# Altium PCB DUTBoard_NO_CAPS_2.PcbDoc (part 3 of 5)
Units mil, origin at the board's own origin, x right, y up, seen from the top; angles counter-clockwise.
Board outline 5475 x 5475 mil, 4 copper layers (Top Layer, Mid-Layer 1, Mid-Layer 2, Bottom Layer); 57 components, 471 nets, 1641 pads, 1025 vias.
Unrouted connection lines stored in the file: 1.
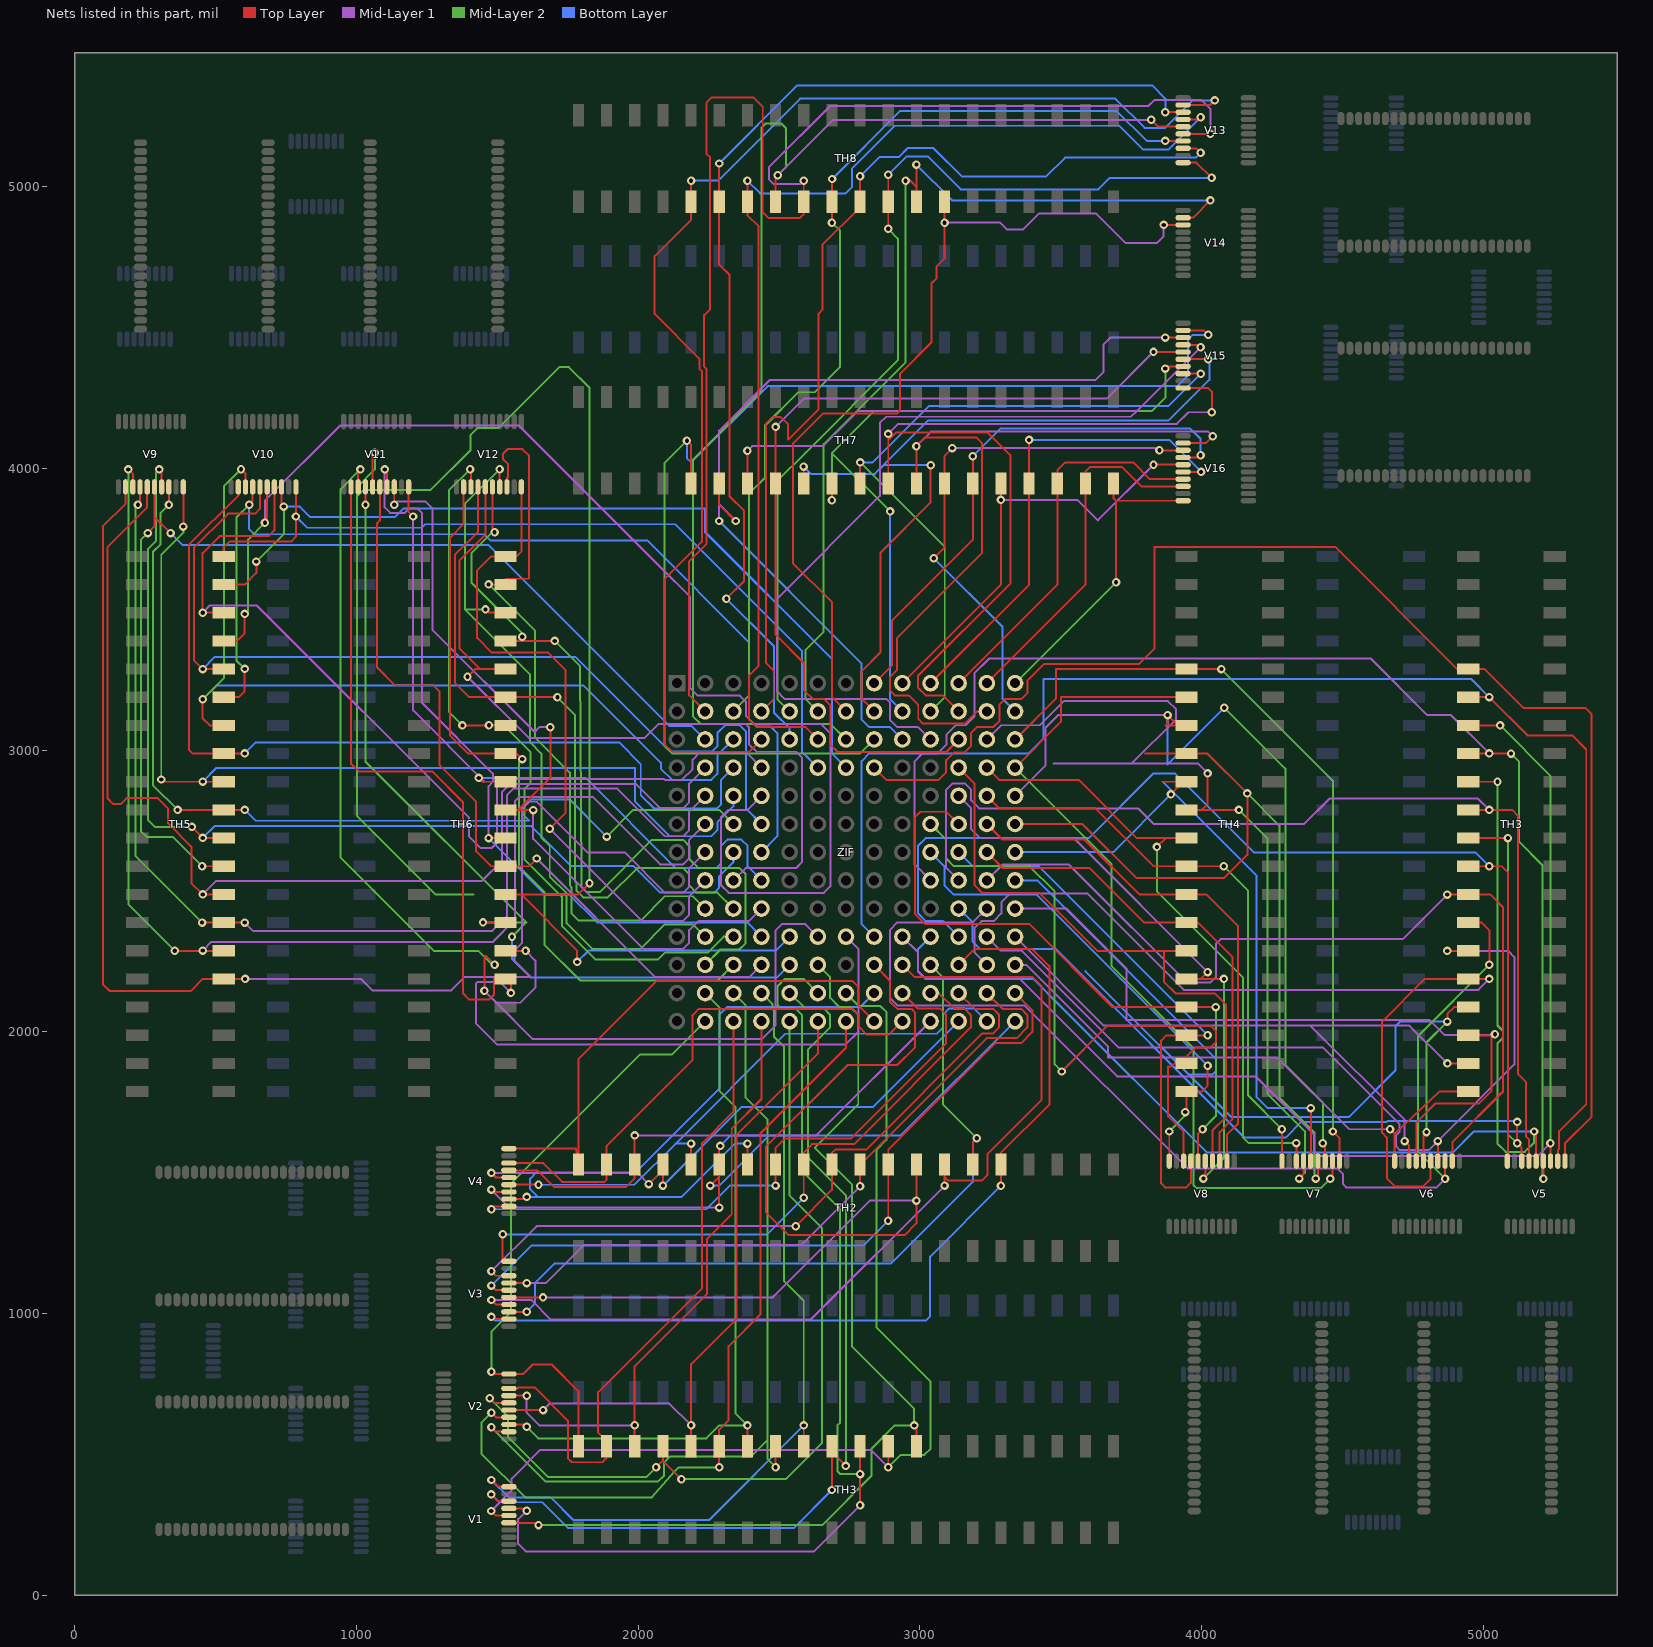
[diagram p5: the nets of this part, all layers, seen from the top]

## Via types
v1: diameter 30, hole 15, Top Layer to Bottom Layer, 1025 vias

## Nets (pads, with @x,y where several pads share a name; then routed paths per layer and width w, separated by ;. In a path a pad name is that pad's centre, name@x,y a point inside that pad or via, vN(x,y) a via of type N, cw(c..) or ccw(c..) an arc to the next point about the centre after c; other vN are vias at no path point) (continued)
INSIDE_B6: TH8.34 V14.IVCC6 ZIF.7 | length 3237.7
  Top Layer w7: ZIF.7@2737.5,3137.5 2688,3187 2688,3524 2549,3663 2549,4088 2655,4194 2917,4194 2930,4207 2930,4336 3041,4447 3041,4656.54 3059,4674.54 3059,4717 3087.5,4745.5 v1(3087.5,4872) TH8.34@3087.5,4946.46 ; v1(3865,4863.98) V14.IVCC6@3933.86,4863.98
  Mid-Layer 1 w7: v1(3087.5,4872) 3285,4872 3310,4847 3365,4847 3422,4904 3625,4904 3730,4799 3840,4799 3865,4824 v1(3865,4863.98)
INSIDE_B7: TH8.33 V14.IVCC7 ZIF.8 | length 3446.8
  Top Layer w7: v1(2949,5021) 2966.5,5021 2987.5,5000 ; TH8.33@2987.5,4946.46 2987.5,5000 ; v1(2987.5,5078) 2987.5,5000 ; V14.IVCC7@3933.86,4889.57 3969.57,4889.57 v1(4031,4951)
  Mid-Layer 2 w7: ZIF.8@2637.5,3137.5 2593,3182 2593,3355 2658,3420 2658,4086 2949,4377 v1(2949,5021)
  Bottom Layer w7: v1(2987.5,5078) 3114.5,4951 v1(4031,4951)
INSIDE_B8: TH8.32 V13.IVCC0 ZIF.9 | length 3477.4
  Top Layer w7: v1(2887.5,4850) TH8.32@2887.5,4946.46 v1(2887.5,5042) ; V13.IVCC0@3933.86,5084.84 3981.16,5084.84 v1(4035,5031)
  Mid-Layer 2 w7: ZIF.9@2537.5,3137.5 2494,3181 2494,3956.04 2593.96,4056 2922,4384.04 2922,4815.5 v1(2887.5,4850)
  Bottom Layer w7: v1(2887.5,5042) 2952.5,5107 3027,5107 3144,4990 3633,4990 3674,5031 v1(4035,5031)
INSIDE_B9: TH8.31 V13.IVCC1 ZIF.10 | length 3640.9
  Top Layer w7: ZIF.10@2437.5,3137.5 2481,3181 2481,3282 2453,3310 2453,4159 2476,4182 2505.7,4182 2532,4155.7 2532,4102 2640,4210 2640,4549.46 2654,4563.46 2654,4793.5 2787.5,4927 TH8.31@2787.5,4946.46 v1(2787.5,5036.5) ; V13.IVCC1@3933.86,5136.02 3979.98,5136.02 v1(3996,5120)
  Bottom Layer w7: v1(2787.5,5036.5) 2855.5,5104.5 2924,5104.5 2956.5,5137 3048,5137 3150,5035 3447,5035 3515,5103 3979,5103 v1(3996,5120)
INSIDE_B10: TH8.30 V13.IVCC2 ZIF.11 | length 3482.8
  Top Layer w7: v1(2687.5,4872) TH8.30@2687.5,4946.46 2687.5,5026.5 v1(2688,5027) ; v1(3871,5162) 3871.39,5161.61 V13.IVCC2@3933.86,5161.61
  Mid-Layer 2 w7: ZIF.11@2337.5,3137.5 2393,3193 2393,3910 2450,3967 2450,4152 2568,4270 2626,4270 2717,4361 2717,4842.5 v1(2687.5,4872)
  Bottom Layer w7: v1(2688,5027) 2929,5268 3699,5268 3805,5162 v1(3871,5162)
INSIDE_B11: TH8.29 V13.IVCC3 ZIF.12 | length 5145.5
  Top Layer w7: ZIF.12@2237.5,3137.5 2181,3194 2181,3669.96 2243,3731.96 2243,4352.15 2234,4361.15 2234,4543.96 2255,4564.96 2255,4900.81 2254.31,4901.49 2254.31,4991.42 2255,4992.1 2255,5104.04 2242,5117.04 2242,5298 2261,5317 2409,5317 2442,5284 2442,4909 2462,4889 2574,4889 2587.5,4902.5 TH8.29@2587.5,4946.46 v1(2587.5,5021) ; V13.IVCC3@3933.86,5187.2 4030.8,5187.2 v1(4031,5187)
  Mid-Layer 1 w7: v1(2587.5,5021) 2575.5,5009 2481,5009 2464,5026 2464,5069 2681,5286 3811,5286 3832,5307 4000,5307 4031,5276 v1(4031,5187)
INSIDE_B12: TH8.28 V13.IVCC4 ZIF.13 | length 4673.2
  Top Layer w7: TH8.28@2487.5,4946.46 2487.5,5032 v1(2495.5,5040) ; v1(3821,5237) 3845.2,5212.8 V13.IVCC4@3933.86,5212.8
  Mid-Layer 1 w7: v1(2495.5,5040) 2692.5,5237 v1(3821,5237)
  Mid-Layer 2 w7: v1(2495.5,5040) 2524,5068.5 2524,5208 2508,5224 2453,5224 2437,5208 2437,4274 2206.15,4043.15 2194,4031 2194,3120 2221,3093 2682,3093 ZIF.13@2737.5,3037.5
INSIDE_B13: TH8.27 V13.IVCC5 ZIF.14 | length 4129.7
  Top Layer w7: v1(2387.5,5021) TH8.27@2387.5,4946.46 2387.5,4899 2427,4859.5 2427,3299 2394,3266 2394,3107 2419,3082 2593,3082 ZIF.14@2637.5,3037.5 ; V13.IVCC5@3933.86,5238.39 3988.39,5238.39 v1(3996,5246)
  Bottom Layer w7: v1(2387.5,5021) 2432.5,4976 2736,4976 2758,4998 2758,5064 2910,5216 3708,5216 3793,5131 3881,5131 v1(3996,5246)
INSIDE_B14: TH8.26 V13.IVCC6 ZIF.15 | length 4028.8
  Top Layer w7: v1(2287.5,5082) TH8.26@2287.5,4946.46 2287.5,4723 2324,4686.5 2324,3901 2376,3849 2376,3600 v1(2313,3537) ; v1(3871,5264) V13.IVCC6@3933.86,5263.98
  Bottom Layer w7: v1(2287.5,5082) 2564.5,5359 3824,5359 3871,5312 v1(3871,5264) ; v1(2313,3537) 2482,3368 2482,3132.15 2537.5,3076.65 ZIF.15@2537.5,3037.5
INSIDE_B15: TH8.25 V13.IVCC7 ZIF.16 | length 4733.3
  Top Layer w7: v1(2187.5,5021) TH8.25@2187.5,4946.46 2187.5,4882.5 2058,4753 2058,4548.5 2217,4389.5 2217,4354.11 2226,4345.11 2226,3739 2093,3606 2093,3021 2120,2994 2394,2994 ZIF.16@2437.5,3037.5 ; V13.IVCC7@3933.86,5289.57 4029.57,5289.57 v1(4046,5306)
  Bottom Layer w7: v1(2187.5,5021) 2284,5021 2575,5312 3694,5312 3797.5,5208.5 3870.5,5208.5 3968,5306 v1(4046,5306)
INSIDE_B16: TH7.40 V16.IVCC0 ZIF.17 | length 1098.8
  Top Layer w7: TH7.40@3687.5,3946.46 3687.5,3893.34 3696,3884.84 ; v1(3696,3596) 3696,3884.84 ; V16.IVCC0@3933.86,3884.84 3696,3884.84
  Mid-Layer 2 w7: ZIF.17@3337.5,3237.5 v1(3696,3596)
INSIDE_B17: TH7.39 V16.IVCC1 ZIF.18 | length 1276.6
  Top Layer w7: ZIF.18@3237.5,3237.5 3587.5,3587.5 TH7.39@3587.5,3946.46 3587.5,3988 3603.5,4004 3717.91,4004 3785.89,3936.02 V16.IVCC1@3933.86,3936.02
INSIDE_B18: TH7.38 V16.IVCC2 ZIF.19 | length 1383
  Top Layer w7: ZIF.19@3137.5,3237.5 3487.5,3587.5 TH7.38@3487.5,3946.46 3487.5,3993 3515.5,4021 3757,4021 3816.39,3961.61 V16.IVCC2@3933.86,3961.61
INSIDE_B19: TH7.37 V16.IVCC3 ZIF.20 | length 1730.3
  Top Layer w7: ZIF.20@3037.5,3237.5 3387.5,3587.5 TH7.37@3387.5,3946.46 v1(3387.5,4101) ; V16.IVCC3@3933.86,3987.2 v1(3998,3987.2)
  Bottom Layer w7: v1(3387.5,4101) 3884.2,4101 v1(3998,3987.2)
INSIDE_B20: TH7.36 V16.IVCC4 ZIF.21 | length 1612.5
  Top Layer w7: ZIF.21@2937.5,3237.5 3287.5,3587.5 v1(3287.5,3888) TH7.36@3287.5,3946.46 ; v1(3829,4012.8) V16.IVCC4@3933.86,4012.8
  Mid-Layer 1 w7: v1(3287.5,3888) 3558.2,3888 3631.2,3815 v1(3829,4012.8)
INSIDE_B21: TH7.35 V16.IVCC5 ZIF.22 | length 1938.6
  Top Layer w7: ZIF.22@2837.5,3237.5 2900,3300 2900,3459.7 3187.5,3747.2 TH7.35@3187.5,3946.46 v1(3187.5,4043) ; V16.IVCC5@3933.86,4038.39 3987.61,4038.39 v1(3996,4046.77)
  Bottom Layer w7: v1(3187.5,4043) 3286.5,4142 3958,4142 3996,4104 v1(3996,4046.77)
INSIDE_B22: TH7.34 V16.IVCC6 ZIF.23 | length 1903.5
  Top Layer w7: v1(3049,3681) 3087.5,3719.5 TH7.34@3087.5,3946.46 3087.5,4044.5 v1(3115,4072) ; v1(3850,4063.98) V16.IVCC6@3933.86,4063.98
  Mid-Layer 1 w7: v1(3115,4072) 3841.98,4072 v1(3850,4063.98)
  Bottom Layer w7: v1(3049,3681) 3293,3437 3293,3182 ZIF.23@3337.5,3137.5
INSIDE_B23: TH7.33 V16.IVCC7 ZIF.24 | length 3035.3
  Top Layer w7: TH7.33@2987.5,3946.46 v1(2987.5,4078) 2987.5,4080 3016.5,4109 3201,4109 3221,4089 3221,3700 2919,3398 2919,3285 2894,3260 2894,3210.47 2910.47,3194 2960.47,3194 2994,3160.47 2994,3110.47 3010.47,3094 3159.53,3094 3203.03,3137.5 ZIF.24@3237.5,3137.5 ; V16.IVCC7@3933.86,4089.57 4014.57,4089.57 v1(4039,4114)
  Mid-Layer 1 w7: v1(2987.5,4078) 3039.5,4130 4023,4130 v1(4039,4114)
INSIDE_B24: TH7.32 V15.IVCC0 ZIF.25 | length 3308.8
  Top Layer w7: v1(2887.5,4122.3) TH7.32@2887.5,3946.46 2887.5,4100 2914.5,4127 3241,4127 3321,4047 3321,3591 2993,3263 2993,3221 3020,3194 3081,3194 ZIF.25@3137.5,3137.5 ; V15.IVCC0@3933.86,4284.84 4023,4284.84 4036,4271.84 v1(4036,4199)
  Mid-Layer 1 w7: v1(2887.5,4122.3) 2923.2,4158 3912.16,4158 3953.16,4199 v1(4036,4199)
INSIDE_B25: TH7.31 V15.IVCC1 ZIF.26 | length 2506.1
  Top Layer w7: TH7.31@2787.5,3946.46 2787.5,4020.5 v1(2788,4021) ; V15.IVCC1@3933.86,4336.02 v1(3997,4336)
  Mid-Layer 2 w7: v1(2788,4021) 3088,3721 3088,3188 ZIF.26@3037.5,3137.5
  Bottom Layer w7: v1(2788,4021) 2832,4021 3032,4221 3882,4221 v1(3997,4336)
INSIDE_B26: TH7.30 V15.IVCC2 ZIF.27 | length 2679.8
  Top Layer w7: v1(2687.5,3887) TH7.30@2687.5,3946.46 ; v1(3871,4354) 3878.61,4361.61 V15.IVCC2@3933.86,4361.61
  Mid-Layer 2 w7: v1(2687.5,3887) 2687.5,4053.5 ; v1(2894,3847) 2687.5,4053.5 ; v1(3871,4354) 3871,4251 3824,4204 2838,4204 2687.5,4053.5
  Bottom Layer w7: v1(2894,3847) 2894,3181 ZIF.27@2937.5,3137.5
INSIDE_B27: TH7.29 V15.IVCC3 ZIF.28 | length 3017.1
  Top Layer w7: v1(2587,4006) 2587.5,4005.5 TH7.29@2587.5,3946.46 ; ZIF.28@2837.5,3137.5 2793,3182 2793,3280 2860,3347 2860,3701 3038,3879 v1(3038,4011) ; V15.IVCC3@3933.86,4387.2 v1(4023,4387.2)
  Bottom Layer w7: v1(2587,4006) 2613,3980 2840,3980 ; v1(3038,4011) 2871,4011 2840,3980 ; v1(4023,4387.2) 4027,4383.2 4027,4314 3883,4170 3030,4170 2840,3980
INSIDE_B28: TH7.28 V15.IVCC4 ZIF.29 | length 3273.3
  Top Layer w7: v1(2487.5,4147) TH7.28@2487.5,3946.46 2487.5,3409.5 2588,3309 2588,3213 2619,3182 2659,3182 2682,3159 2682,3019 2708,2993 3093,2993 ZIF.29@3137.5,3037.5 ; v1(3829,4413) 3829.2,4412.8 V15.IVCC4@3933.86,4412.8
  Mid-Layer 1 w7: v1(2487.5,4147) 2587.5,4247 3663,4247 v1(3829,4413)
INSIDE_B29: TH7.27 V15.IVCC5 ZIF.30 | length 4625.5
  Top Layer w7: TH7.27@2387.5,3946.46 v1(2387.5,4062) ; V15.IVCC5@3933.86,4438.39 3987.61,4438.39 v1(3996,4430)
  Mid-Layer 1 w7: v1(2387.5,4062) 2404,4078.5 2655.5,4078.5 2780,4203 3769,4203 ; ZIF.30@3037.5,3037.5 2994,3081 2920,3081 2893,3108 2893,3169 2880,3182 2519,3182 2493,3208 2493,3537 2858,3902 2858,4161 2880,4183 3749,4183 3769,4203 ; v1(3996,4430) 3769,4203
INSIDE_B30: TH7.26 V15.IVCC6 ZIF.31 | length 3490.8
  Top Layer w7: TH7.26@2287.5,3946.46 2287.5,3871.5 v1(2346,3813) ; v1(3871,4464) V15.IVCC6@3933.86,4463.98
  Mid-Layer 1 w7: v1(2287,3813) 2287,3872 ; v1(2346,3813) 2287,3872 ; v1(3871,4464) 3676,4464 3652,4440 3652,4343 3622,4313 2466,4313 2287,4134 2287,3872
  Bottom Layer w7: v1(2287,3813) 2792,3308 2792,3109 2820,3081 2894,3081 ZIF.31@2937.5,3037.5
INSIDE_B31: TH7.25 V15.IVCC7 ZIF.32 | length 4325.5
  Top Layer w7: v1(2173,4098) 2187.5,4083.5 TH7.25@2187.5,3946.46 ; V15.IVCC7@3933.86,4489.57 4007.43,4489.57 v1(4023,4474)
  Mid-Layer 2 w7: v1(2173,4098) 2094,4019 2094,3014 2120,2988 2788,2988 ZIF.32@2837.5,3037.5
  Bottom Layer w7: v1(2173,4098) 2173,4036 2188,4021 2459,4292 3914,4292 3952,4330 3952,4458 3968,4474 v1(4023,4474)
INSIDE_B32: TH6.40 V12.IVCC0 ZIF.33 | length 2386.5
  Top Layer w7: V12.IVCC0@1585.16,3933.86 1585.16,3704 1568.66,3687.5 TH6.40@1528.54,3687.5 1477.5,3687.5 1428,3638 1428,3398 1480,3346 1680,3346 1742,3284 1742,2777 v1(1686,2721)
  Mid-Layer 1 w7: v1(1686,2721) 2013,2394 2159.53,2394 2181,2415.47 2181,2481 ZIF.33@2237.5,2537.5
INSIDE_B33: TH6.39 V12.IVCC1 ZIF.34 | length 2664.8
  Top Layer w7: v1(1469,3588) 1469.5,3587.5 TH6.39@1528.54,3587.5 1528.54,3608 1613,3608 1613,4044 1589,4068 1536,4068 1520,4052 1520,4032.92 1537,4015.92 1537,3968.03 1533.98,3965 V12.IVCC1@1533.98,3933.86
  Mid-Layer 2 w7: v1(1469,3588) 1634,3423 1634,3043.01 1757,2920.01 1757,2519.35 1763,2513.35 1763,2421 1789.53,2394.47 2008.42,2394.47 2094.94,2481 2194,2481 ZIF.34@2237.5,2437.5
INSIDE_B34: TH6.38 V12.IVCC2 ZIF.35 | length 2607.9
  Top Layer w7: v1(1457.98,3499.02) 1469.5,3487.5 TH6.38@1528.54,3487.5 ; v1(1508,3997) 1508.39,3996.61 V12.IVCC2@1508.39,3933.86
  Mid-Layer 2 w7: v1(1457.98,3499.02) 1384.48,3499.02 ; v1(1508,3997) 1384.48,3873.48 1384.48,3499.02 ; ZIF.35@2237.5,2337.5 2194,2381 2094.94,2381 2008.42,2294.47 1836.53,2294.47 1746,2385 1746,2491 1686,2551 1686,2660 1656.42,2689.58 1656.42,2987.43 1616,3027.85 1616,3267.5 1384.48,3499.02
INSIDE_B35: TH6.37 V12.IVCC3 ZIF.36 | length 2917.2
  Top Layer w7: V12.IVCC3@1482.8,3933.86 1482.8,3780.2 v1(1490,3773) ; TH6.37@1528.54,3387.5 1573.5,3387.5 ; v1(1588,3402) 1573.5,3387.5 ; v1(1703.5,3387.5) 1573.5,3387.5
  Mid-Layer 2 w7: v1(1490,3773) 1482,3773 1409,3700 1409,3593 1588,3414 v1(1588,3402) ; v1(1703.5,3387.5) 1792.5,3298.5 1798,2546.35 1798,2514.5 1816.5,2496 1863,2496 2048,2681 2159.53,2681 2182,2658.53 2182,2613.06 2214.06,2581 2360,2581 2381,2560 2381,2315 2358,2292 2292,2292 ZIF.36@2237.5,2237.5
INSIDE_B36: TH6.36 V12.IVCC4 ZIF.37 | length 2884.8
  Top Layer w7: v1(1394,3260.5) 1421,3287.5 1438.5,3287.5 ; V12.IVCC4@1457.2,3933.86 1457.2,3764.2 1366,3673 1366,3360 1438.5,3287.5 ; TH6.36@1528.54,3287.5 1438.5,3287.5
  Mid-Layer 1 w7: v1(1394,3260.5) 1611.5,3043 2023,3043 2073,3093 2381,3093 2393,3081 2393,3021.15 2420.15,2994 2560.47,2994 2582,2972.47 2582,2603 2560,2581 2381,2581 ZIF.37@2337.5,2537.5
INSIDE_B37: TH6.35 V12.IVCC5 ZIF.38 | length 2522.5
  Top Layer w7: V12.IVCC5@1431.61,3933.86 1431.61,3775.61 1349,3693 1349,3238.5 1400,3187.5 TH6.35@1528.54,3187.5 v1(1713,3187.5)
  Mid-Layer 2 w7: v1(1713,3187.5) 1775.5,3125 1775.5,2534.85 1781,2529.35 1781,2500 1804.13,2476.87 1891.87,2476.87 1996,2581 2159.53,2581 2181,2559.53 2181,2519.53 2206.53,2494 2281,2494 ZIF.38@2337.5,2437.5
INSIDE_B38: TH6.34 V12.IVCC6 ZIF.39 | length 2736.6
  Top Layer w7: v1(1376,3087.5) v1@1470.5,3087.5 ; v1(1403,3997) 1406.02,3993.98 V12.IVCC6@1406.02,3933.86 ; v1(1470,3088) v1@1470.5,3087.5 ; TH6.34@1528.54,3087.5 v1@1470.5,3087.5
  Mid-Layer 2 w7: v1(1376,3087.5) 1328,3135.5 1328,3922 v1(1403,3997) ; v1(1470,3088) 1522,3088 1618,2992 1618,2884 1597,2863 1597,2611.35 1729,2479.35 1729,2377 1850,2256 2069.47,2256 2094.47,2281 2247,2281 2303.5,2337.5 ZIF.39@2337.5,2337.5
INSIDE_B39: TH6.33 V12.IVCC7 ZIF.40 | length 2639.9
  Top Layer w7: V12.IVCC7@1380.43,3933.86 1380.43,3802.43 1332,3754 1332,3051.5 1396,2987.5 TH6.33@1528.54,2987.5 1568.5,2987.5 v1(1588,2968)
  Mid-Layer 2 w7: v1(1588,2968) 1577,2957 1577,2586.07 1666.61,2496.46 1666.61,2309.39 1794,2182 2282,2182 ZIF.40@2337.5,2237.5
INSIDE_B40: TH6.32 V11.IVCC0 ZIF.41 | length 2599.3
  Top Layer w7: V11.IVCC0@1185.16,3933.86 1185.16,3844.84 v1(1201,3829) ; v1(1434,2901) 1447.5,2887.5 TH6.32@1528.54,2887.5
  Mid-Layer 1 w7: v1(1201,3829) 1201,3141 1454,2888 1447,2888 v1(1434,2901)
  Bottom Layer w7: v1(1434,2901) 1813,2901 2132,2582 2279,2582 2293,2596 2293,2659 2316,2682 2366,2682 2388,2660 2388,2587 ZIF.41@2437.5,2537.5
INSIDE_B41: TH6.31 V11.IVCC1 ZIF.42 | length 2819.9
  Top Layer w7: v1(1133.98,3871) V11.IVCC1@1133.98,3933.86 ; TH6.31@1528.54,2787.5 1574.5,2787.5 ; v1(1627,2787) 1626.5,2787.5 1574.5,2787.5 ; v1(1688,3081) 1688,2901 1574.5,2787.5
  Mid-Layer 1 w7: v1(1133.98,3871) 1145.48,3882.5 1244.5,3882.5 1270,3857 1270,3426 1632,3064 1649,3081 v1(1688,3081) ; v1(1627,2787) 1627,2685 2018,2294 2159.53,2294 2181,2315.47 2181,2360.94 2214.06,2394 2394,2394 ZIF.42@2437.5,2437.5
INSIDE_B42: TH6.30 V11.IVCC2 ZIF.43 | length 2791.6
  Top Layer w7: v1(1100,3996) 1108.39,3987.61 V11.IVCC2@1108.39,3933.86 ; v1(1469,2687.5) TH6.30@1528.54,2687.5
  Mid-Layer 1 w7: v1(1100,3996) 1100,3861 1119,3842 1172,3842 1188,3858 1215.5,3858 1233,3840.5 1233,3167 1484,2916 1484,2886.75 1469,2871.75 v1(1469,2687.5)
  Bottom Layer w7: v1(1469,2687.5) 1668.5,2488 1754,2488 1854,2388 2387,2388 ZIF.43@2437.5,2337.5
INSIDE_B43: TH6.29 V11.IVCC3 ZIF.44 | length 2761.4
  Top Layer w7: V11.IVCC3@1082.8,3933.86 1082.8,3815 1073,3805.2 1073,3293 1136,3230 1272,3230 1294,3208 1294,2948 1425,2817 1425,2640 1477.5,2587.5 TH6.29@1528.54,2587.5 1612.5,2587.5 v1(1640,2615)
  Mid-Layer 1 w7: v1(1640,2615) 2061,2194 2394,2194 ZIF.44@2437.5,2237.5
INSIDE_B44: TH6.28 V11.IVCC4 ZIF.45 | length 7368.9
  Top Layer w7: V11.IVCC4@1057.2,3933.86 1057.2,4047.2 v1(1065,4055) ; TH6.28@1528.54,2487.5 1584,2487.5 ; v1(1783.5,2248) 1783.5,2288 1584,2487.5 ; v1(1827,2527.5) 1787,2487.5 1584,2487.5
  Mid-Layer 2 w7: v1(1065,4055) 1065,3996 1002,3933 1002,2765 ; 1416,2487.5 1279.5,2487.5 1002,2765 ; v1(1827,2527.5) 1827,4286 1754,4359 1719.96,4359 1503.96,4143 1429,4143 1405,4119 1405,4065.04 1263.46,3923.5 1025.5,3923.5 1001,3899 1001,2766 1002,2765
  Bottom Layer w7: v1(1783.5,2248) 1823.5,2288 2488,2288 ZIF.45@2537.5,2337.5
INSIDE_B45: TH6.27 V11.IVCC5 ZIF.46 | length 3197.7
  Top Layer w7: V11.IVCC5@1031.61,3933.86 1031.61,3871.39 v1(1032,3871) ; v1(1449,2388) 1449.5,2387.5 TH6.27@1528.54,2387.5
  Mid-Layer 2 w7: v1(1032,3871) 1032,2959 1603,2388 ; v1(1449,2388) 1603,2388 ; v1(1552,2337) 1603,2388
  Bottom Layer w7: v1(1552,2337) 1552,2259 1618,2193 2493,2193 ZIF.46@2537.5,2237.5
INSIDE_B46: TH6.26 V11.IVCC6 ZIF.47 | length 4364.8
  Top Layer w7: V11.IVCC6@1006.02,3933.86 1006.02,3988.02 v1(1014,3996) ; v1(1454,2146) 1454,2269.5 1458.5,2269.5 v1(1490,2238) ; TH6.26@1528.54,2287.5 v1(1600,2287.5)
  Mid-Layer 1 w7: v1(1454,2146) 1497,2103 ; v1(1600,2287.5) 1635,2252.5 1635,2157 1581,2103 1497,2103 ; ZIF.47@2637.5,2337.5 2593,2382 2510,2382 2488,2360 2488,2023 2439,1974 1626,1974 1497,2103
  Mid-Layer 2 w7: v1(1014,3996) 944,3926 944,2618 1274.5,2287.5 1432,2287.5 1481.5,2238 v1(1490,2238)
INSIDE_B47: TH6.25 V11.IVCC7 ZIF.48 | length 4453.4
  Top Layer w7: V11.IVCC7@980.43,3933.86 980.43,2951.57 1008,2924 1269,2924 1378,2815 1378,2136 1399,2115 1472,2115 1488,2131 1488,2187.5 TH6.25@1528.54,2187.5 1548,2187.5 v1(1548,2138)
  Mid-Layer 1 w7: v1(1548,2138) 1510,2176 1429,2176 1424,2171 1424,2030 1500,1954 2735,1954 2782,2001 2782,2293 ZIF.48@2737.5,2337.5
INSIDE_B48: TH5.40 V10.IVCC0 ZIF.49 | length 2923.3
  Top Layer w7: TH5.40@528.54,3687.5 528.54,3720 548.54,3740 768,3740 785.16,3757.16 v1@785.16,3829.16 ; v1(785,3829) v1@785.16,3829.16 ; V10.IVCC0@785.16,3933.86 v1@785.16,3829.16
  Bottom Layer w7: v1(785,3829) 825,3789 1231,3789 1243.5,3801.5 2131.5,3801.5 2582,3351 2582,2993 ZIF.49@2637.5,2937.5
INSIDE_B49: TH5.39 V10.IVCC1 ZIF.50 | length 3132.7
  Top Layer w7: TH5.39@528.54,3587.5 603,3587.5 644.5,3629 v1(644.5,3669) ; V10.IVCC1@733.98,3933.86 733.98,3872 v1(741.98,3864)
  Mid-Layer 2 w7: v1(644.5,3669) 741.98,3766.48 v1(741.98,3864)
  Bottom Layer w7: v1(741.98,3864) 799,3864 836,3827 1136,3827 1167,3858 2237,3858 2237,3774 2688,3323 2688,2987 ZIF.50@2737.5,2937.5
INSIDE_B50: TH5.38 V10.IVCC2 ZIF.51 | length 3420.6
  Top Layer w7: TH5.38@528.54,3487.5 485,3487.5 v1(454,3487.5) 454,3699 514.39,3759.39 688,3759.39 708.39,3779.77 V10.IVCC2@708.39,3933.86
  Mid-Layer 1 w7: v1(454,3487.5) 479.5,3513 646,3513 1400,2759 1400,2693 1440,2653 1481,2653 1499,2671 1499,2873 1523,2897 2091.47,2897 2094.47,2894 2155,2894 2193,2932 2193,2966 2219,2992 2383,2992 ZIF.51@2437.5,2937.5
INSIDE_B51: TH5.37 V10.IVCC3 ZIF.52 | length 4875
  Top Layer w7: TH5.37@528.54,3387.5 576,3387.5 603,3414.5 v1(603,3483) ; v1(675,3807) 682.8,3814.8 V10.IVCC3@682.8,3933.86
  Mid-Layer 1 w7: v1(675,3807) 675,3884.31 942.7,4152 1576,4152 2080,3648 2184,3544 2184,3220 2211,3193 2361,3193 2382,3172 2382,3121 2410,3093 2648,3093 2682,3059 2682,2516 2659,2493 2321,2493 2293,2521 2293,2761 2320,2788 2388,2788 ZIF.52@2437.5,2837.5
  Mid-Layer 2 w7: v1(603,3483) 615,3495 615,3747 v1(675,3807)
INSIDE_B52: TH5.36 V10.IVCC4 ZIF.53 | length 3399
  Top Layer w7: TH5.36@528.54,3287.5 v1(454,3287.5) 423,3318.5 423,3718 544,3839 640,3839 657.2,3856.2 V10.IVCC4@657.2,3933.86
  Bottom Layer w7: v1(454,3287.5) 497.5,3331 1777,3331 2113.53,2994.47 2261.47,2994.47 2281,3014 2281,3060.47 2308.53,3088 2360,3088 2382,3066 2382,2793 ZIF.53@2437.5,2737.5
INSIDE_B53: TH5.35 V10.IVCC5 ZIF.54 | length 3712
  Top Layer w7: TH5.35@528.54,3187.5 582.5,3187.5 603,3208 v1(603,3288) ; v1(619,3871) 631.61,3883.61 V10.IVCC5@631.61,3933.86
  Mid-Layer 2 w7: v1(603,3288) 574,3317 574,3826 v1(619,3871)
  Bottom Layer w7: v1(619,3871) 619,3784 637,3766 1454.04,3766 1475.54,3744.5 2031.5,3744.5 2393,3383 2393,3110.61 2420,3083.61 2470.39,3083.61 2494,3060 2494,2694 ZIF.54@2437.5,2637.5
INSIDE_B54: TH5.34 V10.IVCC6 ZIF.55 | length 3248.5
  Top Layer w7: v1(454,3180) 454,3112 478.5,3087.5 TH5.34@528.54,3087.5 ; v1(590,3997) 606.02,3980.98 V10.IVCC6@606.02,3933.86
  Mid-Layer 2 w7: v1(454,3180) 529,3255 529,3936 v1(590,3997)
  Bottom Layer w7: v1(454,3180) 503,3229 1806,3229 2080,2955 2080,2934 2120,2894 2259.53,2894 2281,2915.47 2281,2981 ZIF.55@2337.5,3037.5
INSIDE_B55: TH5.33 V10.IVCC7 ZIF.56 | length 3232.5
  Top Layer w7: V10.IVCC7@580.43,3933.86 580.43,3903.43 405,3728 405,3000.5 418,2987.5 TH5.33@528.54,2987.5 602.5,2987.5 v1(603,2988)
  Bottom Layer w7: v1(603,2988) 642,3027 1733,3027 1932,3027 2009,2950 2009,2840 2056,2793 2280,2793 2293,2806 2293,2893 ZIF.56@2337.5,2937.5
INSIDE_B56: TH5.32 V9.IVCC0 ZIF.57 | length 3468.9
  Top Layer w7: v1(307,2895.5) 315,2887.5 v1@454.5,2887.5 ; v1(385.16,3793) V9.IVCC0@385.16,3933.86 ; v1(454,2888) v1@454.5,2887.5 ; TH5.32@528.54,2887.5 v1@454.5,2887.5
  Mid-Layer 2 w7: v1(307,2895.5) 307,3693.2 385.16,3771.36 v1(385.16,3793)
  Bottom Layer w7: v1(454,2888) 503,2937 1989,2937 1989,2817 2112,2694 2259.53,2694 2281,2715.47 2281,2743.5 2337.5,2800 ZIF.57@2337.5,2837.5
INSIDE_B57: TH5.31 V9.IVCC1 ZIF.58 | length 3400.6
  Top Layer w7: v1(334,3871) V9.IVCC1@333.98,3933.86 ; v1(365,2787.5) TH5.31@528.54,2787.5 v1(603.5,2787.5)
  Mid-Layer 2 w7: v1(334,3871) 305,3842 305,3731 277,3703 277,2875.5 v1(365,2787.5) ; v1(1888,2693) 1983,2788 2287,2788 ZIF.58@2337.5,2737.5
  Bottom Layer w7: v1(603.5,2787.5) 642,2749 1613.8,2749 1590,2772.8 1590,2792.8 1622.2,2825 1756,2825 v1(1888,2693)
INSIDE_B58: TH5.30 V9.IVCC2 ZIF.59 | length 3725.4
  Top Layer w7: v1(300,3996) 308.39,3987.61 V9.IVCC2@308.39,3933.86 ; v1(416,2727) v1(454,2688) ; TH5.30@528.54,2687.5 v1@454.5,2687.5 ; v1(454,2688) v1@454.5,2687.5 ; v1(454,2688) v1@454.5,2687.5
  Mid-Layer 2 w7: v1(300,3996) 287.5,3983.5 287.5,3741.7 260,3714.2 260,2751 284,2727 v1(416,2727)
  Bottom Layer w7: v1(454,2688) 496,2730 1620.5,2730 1762.5,2588 1983.94,2588 2077.94,2494 2269.53,2494 2287.32,2511.79 2287.32,2551.47 2337.5,2601.65 ZIF.59@2337.5,2637.5
INSIDE_B59: TH5.29 V9.IVCC3 ZIF.60 | length 3868.6
  Top Layer w7: v1(259,3770.2) 282.8,3794 282.8,3827.2 ; V9.IVCC3@282.8,3933.86 282.8,3827.2 ; v1(340,3770) 282.8,3827.2 ; v1(452,2587.5) TH5.29@528.54,2587.5
  Mid-Layer 2 w7: v1(259,3770.2) 235,3746.2 235,2712 255,2692 347.5,2692 v1(452,2587.5)
  Bottom Layer w7: v1(340,3770) 382,3728 1468,3728 2108,3088 2111,3085 2190,3085 ZIF.60@2237.5,3037.5
INSIDE_B60: TH5.28 V9.IVCC4 ZIF.61 | length 4063.1
  Top Layer w7: V9.IVCC4@257.2,3933.86 257.2,3861.2 117,3721 117,2828 137,2808 163,2808 184,2829 294,2829 331,2792 331,2740 414,2657 414,2527.5 v1(454,2487.5) TH5.28@528.54,2487.5
  Mid-Layer 1 w7: v1(454,2487.5) 502,2535.5 1445.5,2535.5 1516,2606 1516,2850.75 1545.25,2880 1991.94,2880 2077.94,2794 2159.53,2794 2181,2815.47 2181,2881 ZIF.61@2237.5,2937.5
INSIDE_B61: TH5.27 V9.IVCC5 ZIF.62 | length 4078
  Top Layer w7: v1(224,3871) 231.61,3878.61 V9.IVCC5@231.61,3933.86 ; v1(452,2387.5) TH5.27@528.54,2387.5 v1(603,2387.5)
  Mid-Layer 1 w7: v1(603,2387.5) 632.5,2358 1482,2358 1534,2410 1534,2840 1557,2863 1925.94,2863 2094.94,2694 2159.53,2694 2181,2715.47 2181,2781 ZIF.62@2237.5,2837.5
  Mid-Layer 2 w7: v1(224,3871) 215,3862 215,2624.5 v1(452,2387.5)
INSIDE_B62: TH5.26 V9.IVCC6 ZIF.63 | length 4473.6
  Top Layer w7: v1(190,3996) 206.02,3979.98 V9.IVCC6@206.02,3933.86 ; v1(355,2287.5) v1@454,2287.5 ; v1(454,2288) v1@454,2287.5 ; TH5.26@528.54,2287.5 v1@454,2287.5
  Mid-Layer 1 w7: v1(454,2288) 485,2319 1484.5,2319 1562.41,2396.91 1562.41,2818.69 1577.72,2834 1837.94,2834 2077.94,2594 2159.53,2594 2181,2615.47 2181,2681 ZIF.63@2237.5,2737.5
  Mid-Layer 2 w7: v1(190,3996) 190,2452.5 v1(355,2287.5)
INSIDE_B63: TH5.25 V9.IVCC7 ZIF.64 | length 4904.6
  Top Layer w7: V9.IVCC7@180.43,3933.86 180.43,3874.43 100,3794 100,2169 125,2144 411.5,2144 455,2187.5 TH5.25@528.54,2187.5 v1(604.52,2187.5)
  Mid-Layer 1 w7: v1(604.52,2187.5) 1015.5,2187.5 1056,2147 1337,2147 1385,2195 1617,2195 1560,2252 1560,2288 1588,2316 1588,2794 1610.5,2816.5 1640,2816.5 1819.5,2637 1951.94,2637 2094.94,2494 2159.53,2494 2181,2515.47 2181,2581 ZIF.64@2237.5,2637.5
INSIDE_B64: TH4.40 V8.IVCC0 ZIF.65 | length 1763.1
  Top Layer w7: V8.IVCC0@3884.84,1541.14 3884.84,1645.84 v1(3885,1646) ; v1(3942,1715) 3946.46,1719.46 TH4.40@3946.46,1787.5 4000,1787.5 4021,1808.5 v1(4021,1879)
  Mid-Layer 2 w7: v1(3885,1646) 3942,1703 v1(3942,1715)
  Bottom Layer w7: ZIF.65@3037.5,2637.5 3087,2588 3087,2520 3119,2488 3412,2488 3712,2188 v1(4021,1879)
INSIDE_B65: TH4.39 V8.IVCC1 ZIF.66 | length 2468
  Top Layer w7: v1(3503,1859) 3665,2021 3687,2021 4032,2021 4051,2002 4051,1964 4032,1945 3979,1945 3946.46,1912.46 TH4.39@3946.46,1887.5 3904,1887.5 3892.5,1876 3881,1876 3881,1864.5 3881,1700.02 3936.02,1645 V8.IVCC1@3936.02,1541.14
  Mid-Layer 2 w7: ZIF.66@3037.5,2737.5 3093,2682 3093,2615 3120,2588 3388,2588 3478,2498 3478,1884 v1(3503,1859)
INSIDE_B66: TH4.38 V8.IVCC2 ZIF.67 | length 2027.4
  Top Layer w7: V8.IVCC2@3961.61,1541.14 3961.61,1464 3945.44,1447.82 3870.18,1447.82 3856,1462 3856,1939.5 3856,1968.5 3875,1987.5 3904,1987.5 TH4.38@3946.46,1987.5 4020.5,1987.5 v1(4021,1988)
  Bottom Layer w7: ZIF.67@3137.5,2637.5 3187,2588 3421,2588 3754,2255 v1(4021,1988)
INSIDE_B67: TH4.37 V8.IVCC3 ZIF.68 | length 2301.5
  Top Layer w7: ZIF.68@3137.5,2737.5 3094,2781 3002,2781 2982,2761 2982,2419 3019,2382 3389,2382 3683.5,2087.5 3818,2087.5 TH4.37@3946.46,2087.5 v1(4050,2087.5) ; V8.IVCC3@3987.2,1541.14 3987.2,1638.2 v1(4003,1654)
  Mid-Layer 2 w7: v1(4003,1654) 4050,1701 v1(4050,2087.5)
INSIDE_B68: TH4.36 V8.IVCC4 ZIF.69 | length 2156.8
  Top Layer w7: TH4.36@3946.46,2187.5 3996.5,2187.5 ; v1(4006,1479) 4012.8,1485.8 V8.IVCC4@4012.8,1541.14 ; v1(4021,2212) 3996.5,2187.5 ; v1(4079,2187.5) 3996.5,2187.5
  Mid-Layer 1 w7: ZIF.69@3137.5,2837.5 3182,2793 3182,2719 3213,2688 3545,2688 v1(4021,2212)
  Mid-Layer 2 w7: v1(4006,1479) 4079,1552 v1(4079,2187.5)
INSIDE_B69: TH4.35 V8.IVCC5 ZIF.70 | length 2229.7
  Top Layer w7: ZIF.70@3137.5,2937.5 3194,2881 3194,2520 3222,2492 3425,2492 3629.5,2287.5 3866,2287.5 ; TH4.35@3946.46,2287.5 3866,2287.5 ; V8.IVCC5@4038.39,1541.14 4038.39,1650.28 4087,1698.9 4087,2096 4047,2136 3907,2136 3866,2177 3866,2287.5
INSIDE_B70: TH4.34 V8.IVCC6 ZIF.71 | length 1768.9
  Top Layer w7: ZIF.71@3237.5,2637.5 3293,2582 3601.5,2582 3796,2387.5 TH4.34@3946.46,2387.5 3987.5,2387.5 4109,2266 4109,1689 4063.98,1643.98 V8.IVCC6@4063.98,1541.14
INSIDE_B71: TH4.33 V8.IVCC7 ZIF.72 | length 1891.6
  Top Layer w7: ZIF.72@3237.5,2737.5 3293,2682 3584,2682 3778.5,2487.5 3806,2487.5 TH4.33@3946.46,2487.5 4016,2487.5 4129,2374.5 4129,1674.43 4089.57,1635 V8.IVCC7@4089.57,1541.14
INSIDE_B72: TH4.32 V7.IVCC0 ZIF.73 | length 2076.1
  Top Layer w7: ZIF.73@3237.5,2837.5 3281,2794 3623,2794 3829.5,2587.5 TH4.32@3946.46,2587.5 v1(4078,2587.5) ; V7.IVCC0@4284.84,1541.14 v1(4284.84,1654)
  Mid-Layer 2 w7: v1(4078,2587.5) 4165,2500.5 4165,1773.84 v1(4284.84,1654)
INSIDE_B73: TH4.31 V7.IVCC1 ZIF.74 | length 2276.3
  Top Layer w7: ZIF.74@3237.5,2937.5 3281,2894 3563.5,2894 3770,2687.5 3872.5,2687.5 ; v1(3841,2656) 3872.5,2687.5 ; TH4.31@3946.46,2687.5 3872.5,2687.5 ; V7.IVCC1@4336.02,1541.14 v1(4336.02,1605)
  Mid-Layer 2 w7: v1(3841,2656) 3841,2498.5 3872,2467.5 4147,2192.5 4147,1624.5 4166.5,1605 v1(4336.02,1605)
INSIDE_B74: TH4.30 V7.IVCC2 ZIF.75 | length 3364.9
  Top Layer w7: TH4.30@3946.46,2787.5 4000.5,2787.5 ; v1(4021,2917) 4021,2808 4000.5,2787.5 ; v1(4132,2787.5) 4000.5,2787.5 ; v1(4346,1479) 4361.61,1494.61 V7.IVCC2@4361.61,1541.14
  Mid-Layer 1 w7: ZIF.75@3237.5,3037.5 3288,3088 3425,3088 3511,3174 3880,3174 3909,3145 3909,3110 3751.5,2952.5 ; 3474.5,2952.5 3985.5,2952.5 v1(4021,2917)
  Mid-Layer 2 w7: v1(4132,2787.5) 4233,2686.5 4233,1780 4366,1647 4366,1499 v1(4346,1479)
INSIDE_B75: TH4.29 V7.IVCC3 ZIF.76 | length 2451.3
  Top Layer w7: 3861.5,2887.5 TH4.29@3946.46,2887.5 3936,2887.5 v1(3891,2842.5) ; V7.IVCC3@4387.2,1541.14 v1(4387.2,1729)
  Bottom Layer w7: ZIF.76@3337.5,2637.5 3686,2637.5 v1(3891,2842.5) ; 3861.5,2887.5 4195,2554 4195,1768 4234,1729 v1(4387.2,1729)
INSIDE_B76: TH4.28 V7.IVCC4 ZIF.77 | length 3311.3
  Top Layer w7: ZIF.77@3337.5,2737.5 3576.5,2737.5 3768,2546 4080,2546 4162,2628 v1(4162,2846) ; 3798.5,2987.5 TH4.28@3946.46,2987.5 4020.5,2987.5 ; v1(4405,1479) 4412.8,1486.8 V7.IVCC4@4412.8,1541.14 ; 4020.5,2987.5 4021,2987.5 4162,2846.5 v1(4162,2846) ; 4020.5,2987.5 v1(4162,2846)
  Mid-Layer 2 w7: v1(4162,2846) 4276,2732 4276,1767 4401,1642 4401,1483 v1(4405,1479)
INSIDE_B77: TH4.27 V7.IVCC5 ZIF.78 | length 3152.5
  Top Layer w7: v1(4430,1604.39) 4438.39,1596 V7.IVCC5@4438.39,1541.14 ; 3872.09,3087.5 TH4.27@3946.46,3087.5 3915.5,3087.5 v1(3879,3124) 3879,3094.41 3872.09,3087.5
  Mid-Layer 1 w7: ZIF.78@3337.5,2837.5 3446,2946 3446,3080 3490,3124 v1(3879,3124)
  Mid-Layer 2 w7: v1(4080.5,3150.5) 4297,2934 4297,1882.5 4430,1749.5 v1(4430,1604.39)
  Bottom Layer w7: v1(3879,3124) 3879,2949 v1(4080.5,3150.5)
INSIDE_B78: TH4.26 V7.IVCC6 ZIF.79 | length 3076.2
  Top Layer w7: ZIF.79@3337.5,2937.5 3500.5,3100.5 3500.5,3187.5 TH4.26@3946.46,3187.5 ; v1(4456,1478) 4463.98,1485.98 V7.IVCC6@4463.98,1541.14
  Mid-Layer 2 w7: ZIF.79@3337.5,2937.5 3680,2595 3680,2233 3971,1942 3971,1456 3981,1446 4424,1446 v1(4456,1478)
INSIDE_B79: TH4.25 V7.IVCC7 ZIF.80 | length 2817.1
  Top Layer w7: ZIF.80@3337.5,3037.5 3483.5,3183.5 3483.5,3287.5 TH4.25@3946.46,3287.5 v1(4070,3287.5) ; v1(4466,1646) 4489.57,1622.43 V7.IVCC7@4489.57,1541.14
  Mid-Layer 2 w7: v1(4070,3287.5) 4466,2891.5 v1(4466,1646)
INSIDE_B80: TH3.40@4946.46,1787.5 V6.IVCC0 ZIF.81 | length 2036.9
  Top Layer w7: v1(4668.84,1654) 4684.84,1638 ; V6.IVCC0@4684.84,1541.14 4684.84,1638 ; TH3.40@4946.46,1787.5 4843.5,1787.5 4684.84,1638
  Mid-Layer 1 w7: ZIF.81@3337.5,2237.5 3377.5,2237.5 3667,1948 3667,1908 4269,1908 4523,1654 v1(4668.84,1654)
INSIDE_B81: TH3.39@4946.46,1887.5 V6.IVCC1 ZIF.82 | length 2421.2
  Top Layer w7: v1(4720,1612) 4736.02,1595.98 V6.IVCC1@4736.02,1541.14 ; v1(4872.09,1887.5) TH3.39@4946.46,1887.5
  Mid-Layer 1 w7: ZIF.82@3337.5,2337.5 3653,2022 4386,2022 ; v1(4720,1612) 4720,1688 4386,2022 ; v1(4872.09,1887.5) 4737.59,2022 4386,2022
INSIDE_B82: TH3.38@4946.46,1987.5 V6.IVCC2 ZIF.83 | length 2745.3
  Top Layer w7: V6.IVCC2@4761.61,1541.14 4761.61,1677.61 4830,1746 4985,1746 5028,1789 5028,1978 v1@5037.5,1987.5 ; TH3.38@4946.46,1987.5 v1@5037.5,1987.5 ; v1(5041,1991) v1@5037.5,1987.5
  Mid-Layer 1 w7: ZIF.83@3337.5,2437.5 3520,2437.5 3732.5,2225 3732.5,2042.5 4808.5,2042.5 4863,1988 5038,1988 v1(5041,1991)
INSIDE_B83: TH3.37@4946.46,2087.5 V6.IVCC3 ZIF.84 | length 3494
  Top Layer w7: V6.IVCC3@4787.2,1541.14 4787.2,1633.2 v1(4798,1644) ; v1(4872,2036) 4872,2063.5 4896,2087.5 TH3.37@4946.46,2087.5
  Mid-Layer 2 w7: v1(4798,1644) 4798,1962 v1(4872,2036)
  Bottom Layer w7: ZIF.84@3337.5,2537.5 3416,2537.5 4051,1902.5 4051,1861 4039,1849 3953,1849 ; 3587,2215 4104,1698 4523,1698 4688,1863 4688,2020 4704,2036 v1(4872,2036)
INSIDE_B84: TH3.36@4946.46,2187.5 V6.IVCC4 ZIF.85 | length 3456.5
  Top Layer w7: V6.IVCC4@4812.8,1541.14 4812.8,1478.8 4784,1450 4687,1450 4657,1480 4657,1624.5 4640.34,1641.16 4640.34,2036.34 4791.5,2187.5 TH3.36@4946.46,2187.5 v1(5021,2187.5)
  Mid-Layer 1 w7: ZIF.85@3237.5,2237.5 3193,2282 3193,2367 3219,2393 3262,2393 3289,2420 3289,2460 3319,2490 3595,2490 3613,2472 3936,2149 4982.5,2149 v1(5021,2187.5)
INSIDE_B85: TH3.35@4946.46,2287.5 V6.IVCC5 ZIF.86 | length 3150.6
  Top Layer w7: v1(4838,1612) 4838.39,1611.61 V6.IVCC5@4838.39,1541.14 ; v1(4872,2287) 4872.5,2287.5 TH3.35@4946.46,2287.5
  Mid-Layer 1 w7: ZIF.86@3237.5,2337.5 3287,2288 3362,2288 3706,1944 4431,1944 4703,1672 4703,1645 4690,1632 4690,1593 4703,1580 4806,1580 v1(4838,1612) 5110,1884 5110,2265 5088,2287 v1(4872,2287)
INSIDE_B86: TH3.34@4946.46,2387.5 V6.IVCC6 ZIF.87 | length 4075.1
  Top Layer w7: v1(4864,1478) V6.IVCC6@4863.98,1541.14 ; TH3.34@4946.46,2387.5 4993.5,2387.5 5021,2360 v1(5021,2238)
  Mid-Layer 1 w7: ZIF.87@3237.5,2437.5 3188,2388 2920,2388 2893,2361 2893,2121 2920,2094 3371,2094 3950,1515 4482,1515 4501,1496 4501,1460 4513,1448 4834,1448 v1(4864,1478)
  Mid-Layer 2 w7: v1(4864,1478) 4768,1574 4768,1985 v1(5021,2238)
INSIDE_B87: TH3.33@4946.46,2487.5 V6.IVCC7 ZIF.88 | length 3221.5
  Top Layer w7: v1(4872,2487) 4872.5,2487.5 TH3.33@4946.46,2487.5 5024,2487.5 5069.5,2442 5069.5,1787.93 4889.57,1608 V6.IVCC7@4889.57,1541.14
  Mid-Layer 1 w7: ZIF.88@3237.5,2537.5 3293,2593 3529,2593 3562,2560 3947,2175 4032,2175 4050,2193 4050,2312 4067,2329 4714,2329 v1(4872,2487)
INSIDE_B88: TH3.32@4946.46,2587.5 V5.IVCC0 ZIF.89 | length 3863.7
  Top Layer w7: TH3.32@4946.46,2587.5 v1(5021,2587.5) 5065.34,2587.5 5086.5,2566.34 5086.5,1542.8 V5.IVCC0@5084.84,1541.14
  Bottom Layer w7: ZIF.89@3137.5,2337.5 3082,2393 3021,2393 2993,2421 2993,2660 3020,2687 3599,2687 3829,2917 3905,2917 4185,2637 4971.5,2637 v1(5021,2587.5)
INSIDE_B89: TH3.31@4946.46,2687.5 V5.IVCC1 ZIF.90 | length 3770.7
  Top Layer w7: TH3.31@4946.46,2687.5 v1(5087,2687.5) ; v1(5120,1680) v1(5120,1604) 5136.02,1587.98 V5.IVCC1@5136.02,1541.14
  Mid-Layer 2 w7: v1(5087,2687.5) 5087,1637 v1(5120,1604)
  Bottom Layer w7: ZIF.90@3137.5,2437.5 3187,2388 3187,2320 3214,2293 3477,2293 3480,2296 4152,1624 4298,1624 4354,1680 4656.34,1680 4659.34,1683 5117,1683 v1(5120,1680)
INSIDE_B90: TH3.30@4946.46,2787.5 V5.IVCC2 ZIF.91 | length 3840
  Top Layer w7: TH3.30@4946.46,2787.5 v1(5021,2787.5) 5102,2787.5 5122,2767.5 5122,1851 5151,1822 5151,1629.7 5161.61,1619.09 V5.IVCC2@5161.61,1541.14
  Mid-Layer 1 w7: ZIF.91@3137.5,2537.5 3093,2582 3093,2859 3116,2882 3159,2882 3182,2859 3182,2821 3210,2793 3774,2793 3829,2738 4364,2738 4454,2828 4980.5,2828 v1(5021,2787.5)
INSIDE_B91: TH3.29@4946.46,2887.5 V5.IVCC3 ZIF.92 | length 4332.5
  Top Layer w7: TH3.29@4946.46,2887.5 v1(5050,2887.5) ; v1(5180,1646) 5187.2,1638.8 V5.IVCC3@5187.2,1541.14
  Mid-Layer 2 w7: v1(5050,2887.5) 5050,2022.31 5069.5,2002.81 5069.5,1979.2 5050,1959.7 5050,1603 5079,1574 5147,1574 5180,1607 v1(5180,1646)
  Bottom Layer w7: ZIF.92@3037.5,2337.5 2993,2293 2993,2215 3020,2188 3402,2188 3502,2088 4019,1571 4891,1571 4966,1646 v1(5180,1646)
INSIDE_B92: TH3.28@4946.46,2987.5 V5.IVCC4 ZIF.93 | length 4659.6
  Top Layer w7: TH3.28@4946.46,2987.5 v1@5020.5,2987.5 ; v1(5021,2988) v1@5020.5,2987.5 ; v1(5098,2987.5) v1@5020.5,2987.5 ; V5.IVCC4@5212.8,1541.14 5212.8,1478.2 v1(5213,1478)
  Mid-Layer 1 w7: ZIF.93@3037.5,2537.5 2981,2594 2981,2960 3009,2988 3062.47,2988 3094,3019.53 3094,3054.85 3127.15,3088 3162,3088 3193,3119 3193,3272 3246,3325 4600,3325 4801,3124 4885,3124 v1(5021,2988)
  Mid-Layer 2 w7: v1(5098,2987.5) 5127,2958.5 5127,2674 5209,2592 5209,1482 v1(5213,1478)
INSIDE_B93: TH3.27@4946.46,3087.5 V5.IVCC5 ZIF.94 | length 4448.4
  Top Layer w7: TH3.27@4946.46,3087.5 v1(5059,3087.5) ; v1(5238,1604) 5238.39,1603.61 V5.IVCC5@5238.39,1541.14
  Mid-Layer 1 w7: ZIF.94@2937.5,2337.5 2993,2282 2993,2215 3020,2188 3354,2188 3700,1842 4191,1842 4399,1634 4399,1576 4416.5,1558.5 5192.5,1558.5 v1(5238,1604)
  Mid-Layer 2 w7: v1(5059,3087.5) 5238,2908.5 v1(5238,1604)
INSIDE_B94: TH3.26@4946.46,3187.5 V5.IVCC6 ZIF.95 | length 5141.4
  Top Layer w7: TH3.26@4946.46,3187.5 v1@5020.5,3187.5 ; v1(5021,3188) v1@5020.5,3187.5 ; V5.IVCC6@5263.98,1541.14 5263.98,1579 5269,1584.02 5269,1647 5365,1743 5365,3002 5315,3052 5156.5,3052 5021,3187.5 v1@5020.5,3187.5
  Bottom Layer w7: ZIF.95@2837.5,2337.5 2793,2382 2793,2961 2820,2988 3386,2988 3438,3040 3438,3253 4956,3253 v1(5021,3188)
INSIDE_B95: TH3.25@4946.46,3287.5 V5.IVCC7 ZIF.96 | length 5101.4
  Top Layer w7: ZIF.96@2837.5,2937.5 2881,2894 3066,2894 3093,2921 3093,2964 3121,2992 3159,2992 3182,3015 3182,3061 3203,3082 3261,3082 3282,3103 3282,3161 3303,3182 3361,3182 3382,3203 3382,3247 3440,3305 3777,3305 3832,3360 3832,3721 4473.5,3721 4907,3287.5 TH3.25@4946.46,3287.5 5004.5,3287.5 5142,3150 5361,3150 5384,3127 5384,1698 5289.57,1603.57 V5.IVCC7@5289.57,1541.14
INSIDE_B96: TH2.40 V4.IVCC0 ZIF.97 | length 1931.4
  Top Layer w7: V4.IVCC0@1541.14,1585.16 1778.34,1585.16 TH2.40@1787.5,1528.54 1787.5,1647.5 1787.5,1902.03 2066.47,2181 2759.53,2181 2781,2159.53 2781,2094 ZIF.97@2837.5,2037.5
INSIDE_B97: TH2.39 V4.IVCC1 ZIF.98 | length 1922.2
  Top Layer w7: V4.IVCC1@1541.14,1533.98 1663.02,1533.98 1730,1467 1879.57,1467 1887.5,1474.93 TH2.39@1887.5,1528.54 1887.5,1595 2193,1900.5 2193,2059 2215,2081 2761,2081 2782,2060 2782,2019 2810,1991 2891,1991 ZIF.98@2937.5,2037.5
INSIDE_B98: TH2.38 V4.IVCC2 ZIF.99 | length 1853.3
  Top Layer w7: V4.IVCC2@1541.14,1508.39 1641.61,1508.39 1700.42,1449.58 1957.08,1449.58 1987.5,1480 TH2.38@1987.5,1528.54 v1(1987.5,1632)
  Mid-Layer 1 w7: v1(1987.5,1632) 2632,1632 ZIF.99@3037.5,2037.5
INSIDE_B99: TH2.37 V4.IVCC3 ZIF.100 | length 2474.7
  Top Layer w7: v1(1479,1499) 1495.2,1482.8 V4.IVCC3@1541.14,1482.8 ; v1(2037.75,1459.25) TH2.37@2087.5,1509 ; v1(2087.5,1454) v1@2087.5,1454.5 ; TH2.37@2087.5,1528.54 TH2.37@2087.5,1509 ; v1(2088,1454) v1@2087.5,1454.5 ; v1@2087.5,1454.5 TH2.37@2087.5,1509
  Mid-Layer 1 w7: v1(1479,1499) 1998,1499 v1(2037.75,1459.25)
  Bottom Layer w7: v1(2087.5,1454) 2302.5,1669 2366.2,1732.2 ; v1(2088,1454) 2366.2,1732.2 ; ZIF.100@3137.5,2037.5 2832.2,1732.2 2366.2,1732.2
INSIDE_B100: TH2.36 V4.IVCC4 ZIF.101 | length 2129.6
  Top Layer w7: V4.IVCC4@1541.14,1457.2 1645.8,1457.2 v1(1646,1457) ; TH2.36@2187.5,1528.54 v1(2187.5,1603)
  Bottom Layer w7: v1(1646,1457) 1986.5,1457 2132.5,1603 ; v1(2187.5,1603) 2132.5,1603 ; ZIF.101@3237.5,2037.5 3193,2082 3103,2082 3082,2061 3082,2016 3059,1993 2522.5,1993 2132.5,1603
INSIDE_B101: TH2.35 V4.IVCC5 ZIF.102 | length 2637.3
  Top Layer w7: v1(1479,1440) 1487.39,1431.61 V4.IVCC5@1541.14,1431.61 ; v1(2255.5,1454) 2287.5,1486 v1(2287.5,1376) ; TH2.35@2287.5,1528.54 2287.5,1591.5 v1(2291,1595)
  Mid-Layer 1 w7: v1(1479,1440) 1543,1376 v1(2287.5,1376)
  Bottom Layer w7: v1(2255.5,1454) 2287.5,1454 2465.5,1632 ; v1(2291,1595) 2328,1632 2465.5,1632 ; ZIF.102@3337.5,2037.5 2932,1632 2465.5,1632
INSIDE_B102: TH2.34 V4.IVCC6 ZIF.103 | length 3237.2
  Top Layer w7: V4.IVCC6@1541.14,1406.02 1596.02,1406.02 v1(1604,1414) ; TH2.34@2387.5,1528.54 v1(2387.5,1603)
  Bottom Layer w7: v1(1604,1414) 2153.89,1414 ; v1(2387.5,1603) 2342.89,1603 2153.89,1414 ; ZIF.103@2837.5,2137.5 2788,2088 2316,2088 2288,2060 2288,1798 1991,1501 1638,1501 1616,1479 1616,1441 1643,1414 2153.89,1414
INSIDE_B103: TH2.33 V4.IVCC7 ZIF.104 | length 2292.1
  Top Layer w7: v1(1479,1370) 1489.43,1380.43 V4.IVCC7@1541.14,1380.43 ; v1(2487.5,1454) TH2.33@2487.5,1528.54 2487.5,1588 2521.5,1622 2756,1622 3093,1959 3093,2061 3072,2082 2993,2082 ZIF.104@2937.5,2137.5
  Bottom Layer w7: v1(1479,1370) 2240.89,1370 2324.89,1454 v1(2487.5,1454)
INSIDE_B104: TH2.32 V3.IVCC0 ZIF.105 | length 2398.1
  Top Layer w7: v1(1519,1281) 1519,1185.16 V3.IVCC0@1541.14,1185.16 ; v1(2587.5,1410.5) TH2.32@2587.5,1528.54 2587.5,1571 2617.5,1601 2766.53,1601 3181,2015.47 3181,2059.53 3158.53,2082 3123,2082 3067.5,2137.5 ZIF.105@3037.5,2137.5
  Bottom Layer w7: v1(1519,1281) 2458,1281 v1(2587.5,1410.5)
INSIDE_B105: TH2.31 V3.IVCC1 ZIF.106 | length 2526.2
  Top Layer w7: v1(1479,1149.98) 1495,1133.98 V3.IVCC1@1541.14,1133.98 ; v1(2559,1310) 2687.5,1438.5 TH2.31@2687.5,1528.54 2687.5,1570 2699.5,1582 2809.45,1582 3221.92,1994.47 3260,1994.47 3281,2015.47 3281,2059.53 3259.53,2081 3194,2081 ZIF.106@3137.5,2137.5
  Mid-Layer 1 w7: v1(1479,1149.98) 1639.02,1310 v1(2559,1310)
INSIDE_B106: TH2.30 V3.IVCC2 ZIF.107 | length 2495.3
  Top Layer w7: V3.IVCC2@1541.14,1108.39 1604,1108.39 v1(1604.39,1108) ; v1(2787.5,1451.34) TH2.30@2787.5,1528.54 3236.43,1977.47 3343,1977.47 3381,2015.47 3381,2059.53 3359.53,2081 3293,2081 3261,2113 3237.5,2113 ZIF.107@3237.5,2137.5
  Mid-Layer 1 w7: v1(1604.39,1108) 1671,1108 1806,1243 2579.16,1243 v1(2787.5,1451.34)
INSIDE_B107: TH2.29 V3.IVCC3 ZIF.108 | length 2672.4
  Top Layer w7: v1(1479,1099) 1495.2,1082.8 V3.IVCC3@1541.14,1082.8 ; v1(2887,1329) 2887.5,1329.5 TH2.29@2887.5,1528.54 2887.5,1581 3266.5,1960 3359,1960 3399,2000 3399,2076 ZIF.108@3337.5,2137.5
  Bottom Layer w7: v1(1479,1099) 1621,1241 2799,1241 v1(2887,1329)
INSIDE_B108: TH2.28 V3.IVCC4 ZIF.109 | length 3673
  Top Layer w7: V3.IVCC4@1541.14,1057.2 1661.8,1057.2 v1(1662,1057) ; ZIF.109@2837.5,2237.5 2893,2182 2893,2107.53 2919.53,2081 2969.96,2081 2982,2068.96 2982,1944 2920,1882 2743,1882 2453,1592 2453,1360 2535,1278 2945.5,1278 2987.5,1320 v1(2987.5,1401) TH2.28@2987.5,1528.54
  Mid-Layer 1 w7: v1(1662,1057) 2478,1057 2822,1401 v1(2987.5,1401)
INSIDE_B109: TH2.27 V3.IVCC5 ZIF.110 | length 3463.4
  Top Layer w7: v1(1479,1048) 1495.39,1031.61 V3.IVCC5@1541.14,1031.61 ; ZIF.110@2937.5,2237.5 2981,2194 3400,2194 3432,2162 3432,1759 3240,1567 3240,1492 3220,1472 3100,1472 3087.5,1484.5 TH2.27@3087.5,1528.54 v1(3087.5,1454)
  Mid-Layer 1 w7: v1(1479,1048) 1620,1048 1690,978 2611.5,978 v1(3087.5,1454)
INSIDE_B110: TH2.26 V3.IVCC6 ZIF.111 | length 2823.9
  Top Layer w7: V3.IVCC6@1541.14,1006.02 v1(1604,1006.02) ; TH2.26@3187.5,1528.54 3187.5,1607.5 v1(3202,1622)
  Mid-Layer 2 w7: ZIF.111@3037.5,2237.5 3081,2194 3081,1743 v1(3202,1622)
  Bottom Layer w7: v1(1604,1006.02) 1633,1035.02 1633,1108 1703,1178 2898,1178 3187.5,1467.5 3187.5,1603 3187.5,1607.5 v1(3202,1622)
INSIDE_B111: TH2.25 V3.IVCC7 ZIF.112 | length 3421.6
  Top Layer w7: v1(1479,988) 1486.57,980.43 V3.IVCC7@1541.14,980.43 ; ZIF.112@3137.5,2237.5 3193,2293 3399,2293 3459.19,2232.81 3459.19,1741.69 3287.5,1570 TH2.25@3287.5,1528.54 v1(3287.5,1453.5)
  Bottom Layer w7: v1(1479,988) 1492,975 3021,975 3036,990 3036,1202 v1(3287.5,1453.5)
INSIDE_B112: TH3.40@1787.5,528.54 V2.IVCC0 ZIF.113 | length 2185.7
  Top Layer w7: v1(1479,793) 1486.84,785.16 V2.IVCC0@1541.14,785.16 1591,785.16 1624.84,819 1693,819 1787.5,724.5 TH3.40@1787.5,528.54
  Mid-Layer 2 w7: v1(1479,793) 1479,935 1548,1004 1548,1461 2007,1920 2120,1920 ZIF.113@2237.5,2037.5
INSIDE_B113: TH3.39@1887.5,528.54 V2.IVCC1 ZIF.114 | length 2303.1
  Top Layer w7: V2.IVCC1@1541.14,733.98 1570.98,733.98 1575,738 1632,738 1750,620 1750,487 1765,472 1871.5,472 1887.5,488 TH3.39@1887.5,528.54 1887.5,548 1858,577.5 1858,721.2 2227,1090.2 2227,1605 2337.5,1715.5 ZIF.114@2337.5,2037.5
INSIDE_B114: TH3.38@1987.5,528.54 V2.IVCC2 ZIF.115 | length 2220.5
  Top Layer w7: V2.IVCC2@1541.14,708.39 1603.61,708.39 v1(1604,708) ; TH3.38@1987.5,528.54 v1(1987.5,603) 1987.5,812.3 2244,1068.8 2244,1263.5 2332,1351.5 2332,1655.83 2437.5,1761.33 ZIF.115@2437.5,2037.5
  Mid-Layer 1 w7: v1(1604,708) 1604,648 1649,603 v1(1987.5,603)
INSIDE_B115: TH3.37@2087.5,528.54 V2.IVCC3 ZIF.116 | length 3112.6
  Top Layer w7: v1(1473,699) 1489.2,682.8 V2.IVCC3@1541.14,682.8 ; v1(2063.5,454) 2087.5,478 ; TH3.37@2087.5,528.54 2087.5,478 ; v1(2153.5,412) 2087.5,478
  Mid-Layer 2 w7: v1(1473,699) 1538.59,633.41 1538.59,560.91 1679.5,420 2029.5,420 v1(2063.5,454) ; v1(2153.5,412) 2524,412 2653,541 2653,1303 2537.5,1418.5 ZIF.116@2537.5,2037.5
INSIDE_B116: TH3.36@2187.5,528.54 V2.IVCC4 ZIF.117 | length 2383
  Top Layer w7: V2.IVCC4@1541.14,657.2 v1(1662.2,657.2) ; TH3.36@2187.5,528.54 v1(2187.5,603) 2187.5,820.5 2349,982 2349,1634 2637.5,1922.5 ZIF.117@2637.5,2037.5
  Mid-Layer 1 w7: v1(1662.2,657.2) 1685,680 2110.5,680 v1(2187.5,603)
INSIDE_B117: TH3.35@2287.5,528.54 V2.IVCC5 ZIF.118 | length 2956
  Top Layer w7: v1(1479,648) 1495.39,631.61 V2.IVCC5@1541.14,631.61 ; v1(2287.5,454) TH3.35@2287.5,528.54 2287.5,587.5 2321,621 2321,884 2434,997 2434,1565 2434,1640 2737.5,1943.5 ZIF.118@2737.5,2037.5
  Mid-Layer 2 w7: v1(1479,648) 1443,612 1443,502.85 1598.85,347 2048.66,347 2128,438 2144,454 v1(2287.5,454)
INSIDE_B118: TH3.34@2387.5,528.54 V2.IVCC6 ZIF.119 | length 2556.7
  Top Layer w7: V2.IVCC6@1541.14,606.02 1595.98,606.02 v1(1604,598) ; TH3.34@2387.5,528.54 v1(2387.5,602.91)
  Mid-Layer 2 w7: v1(1604,598) 1645,557 2242,557 2288,603 v1@2387.41,603 ; ZIF.119@2237.5,2137.5 2288,2087 2288,1790 2346,1732 2346,644.41 v1@2387.41,603 ; v1(2387.5,602.91) v1@2387.41,603
INSIDE_B119: TH3.33@2487.5,528.54 V2.IVCC7 ZIF.120 | length 3037.6
  Top Layer w7: v1(1479,596) 1494.57,580.43 V2.IVCC7@1541.14,580.43 ; v1(2487.5,454.17) TH3.33@2487.5,528.54
  Mid-Layer 2 w7: v1(1479,596) 1672,403 2070,403 2092,425 2092,472 2112,492 2399,492 2459,552 ; ZIF.120@2337.5,2137.5 2381,2094 2381,1766 2459,1688 2459,552 ; v1(2487.5,454.17) 2459,482.67 2459,552
INSIDE_B120: TH3.32@2587.5,528.54 V1.IVCC0 ZIF.121 | length 3049.6
  Top Layer w7: v1(1479,409) 1502.84,385.16 V1.IVCC0@1541.14,385.16 ; TH3.32@2587.5,528.54 v1(2587.5,602.91)
  Mid-Layer 2 w7: ZIF.121@2437.5,2137.5 2477,2098 2477,2081.47 2482,2076.47 2482,1983 2517,1948 2517,1116 2587.5,1045.5 v1(2587.5,602.91)
  Bottom Layer w7: v1(1479,409) 1540.5,347.5 1689.5,347.5 1770,267 2251.59,267 v1(2587.5,602.91)
INSIDE_B121: TH3.31@2687.5,528.54 V1.IVCC1 ZIF.122 | length 3477.6
  Top Layer w7: v1(1478,358) 1502.02,333.98 V1.IVCC1@1541.14,333.98 ; v1(2687.5,373.5) TH3.31@2687.5,508.5 ; TH3.31@2687.5,528.54 TH3.31@2687.5,508.5 ; v1(2737,459) TH3.31@2687.5,508.5
  Mid-Layer 2 w7: ZIF.122@2537.5,2137.5 2594,2081 2659.53,2081 2681,2059.53 2681,2015.47 2603,1937.47 2603,1553 2737,1419 v1(2737,459)
  Bottom Layer w7: v1(1478,358) 1506,330 1659,330 1751,238 2552,238 v1(2687.5,373.5)
INSIDE_B122: TH3.30@2787.5,528.54 V1.IVCC2 ZIF.123 | length 3810.1
  Top Layer w7: V1.IVCC2@1541.14,308.39 1595.61,308.39 v1(1604,300) ; v1(2787.5,319.5) v1(2787.5,430) TH3.30@2787.5,528.54
  Mid-Layer 1 w7: v1(1604,300) 1574,270 1574,182 1600,156 2624,156 v1(2787.5,319.5)
  Mid-Layer 2 w7: ZIF.123@2637.5,2137.5 2587,2188 2520,2188 2494.47,2162.47 2494.47,2094 2504.47,2084 2557,2084 2582,2059 2582,1515 2577,1510 2717,1370 2717,613 2707,603 2707,441 2718,430 v1(2787.5,430)
INSIDE_B123: TH3.29@2887.5,528.54 V1.IVCC3 ZIF.124 | length 3688.1
  Top Layer w7: v1(1478,299) 1494.2,282.8 V1.IVCC3@1541.14,282.8 ; v1(2887.5,454.17) TH3.29@2887.5,528.54
  Mid-Layer 1 w7: v1(1478,299) 1551,372 1551,414 1653,516 2825.67,516 v1(2887.5,454.17)
  Mid-Layer 2 w7: ZIF.124@2737.5,2137.5 2783.71,2091.29 2860,2091.29 2881,2070.29 2881,1616 2845,1580 2845,951 3038,758 3038,520 3016,498 2931.33,498 v1(2887.5,454.17)
INSIDE_B124: TH3.28@2987.5,528.54 V1.IVCC4 ZIF.125 | length 3650.2
  Top Layer w7: V1.IVCC4@1541.14,257.2 1637.8,257.2 v1(1646,249) ; v1(2979.5,602.91) 2980.59,602.91 2987.5,596 TH3.28@2987.5,528.54
  Mid-Layer 2 w7: v1(1646,249) 2653,249 2828,424 2828,520 2911,603 2979.41,603 v1(2979.5,602.91) 2979.5,662.5 2758,884 2758,1458 2627,1589 2781,1743 2781,2060 2753,2088 2713,2088 2681,2120 2681,2194 ZIF.125@2637.5,2237.5